# Altium PCB pcb.PcbDoc
Units mil, origin at the board's own origin, x right, y up, seen from the top; angles counter-clockwise.
Board outline 6000 x 4000 mil, 2 copper layers (Top Layer, Bottom Layer); 5 components, 0 nets, 88 pads, 0 vias.
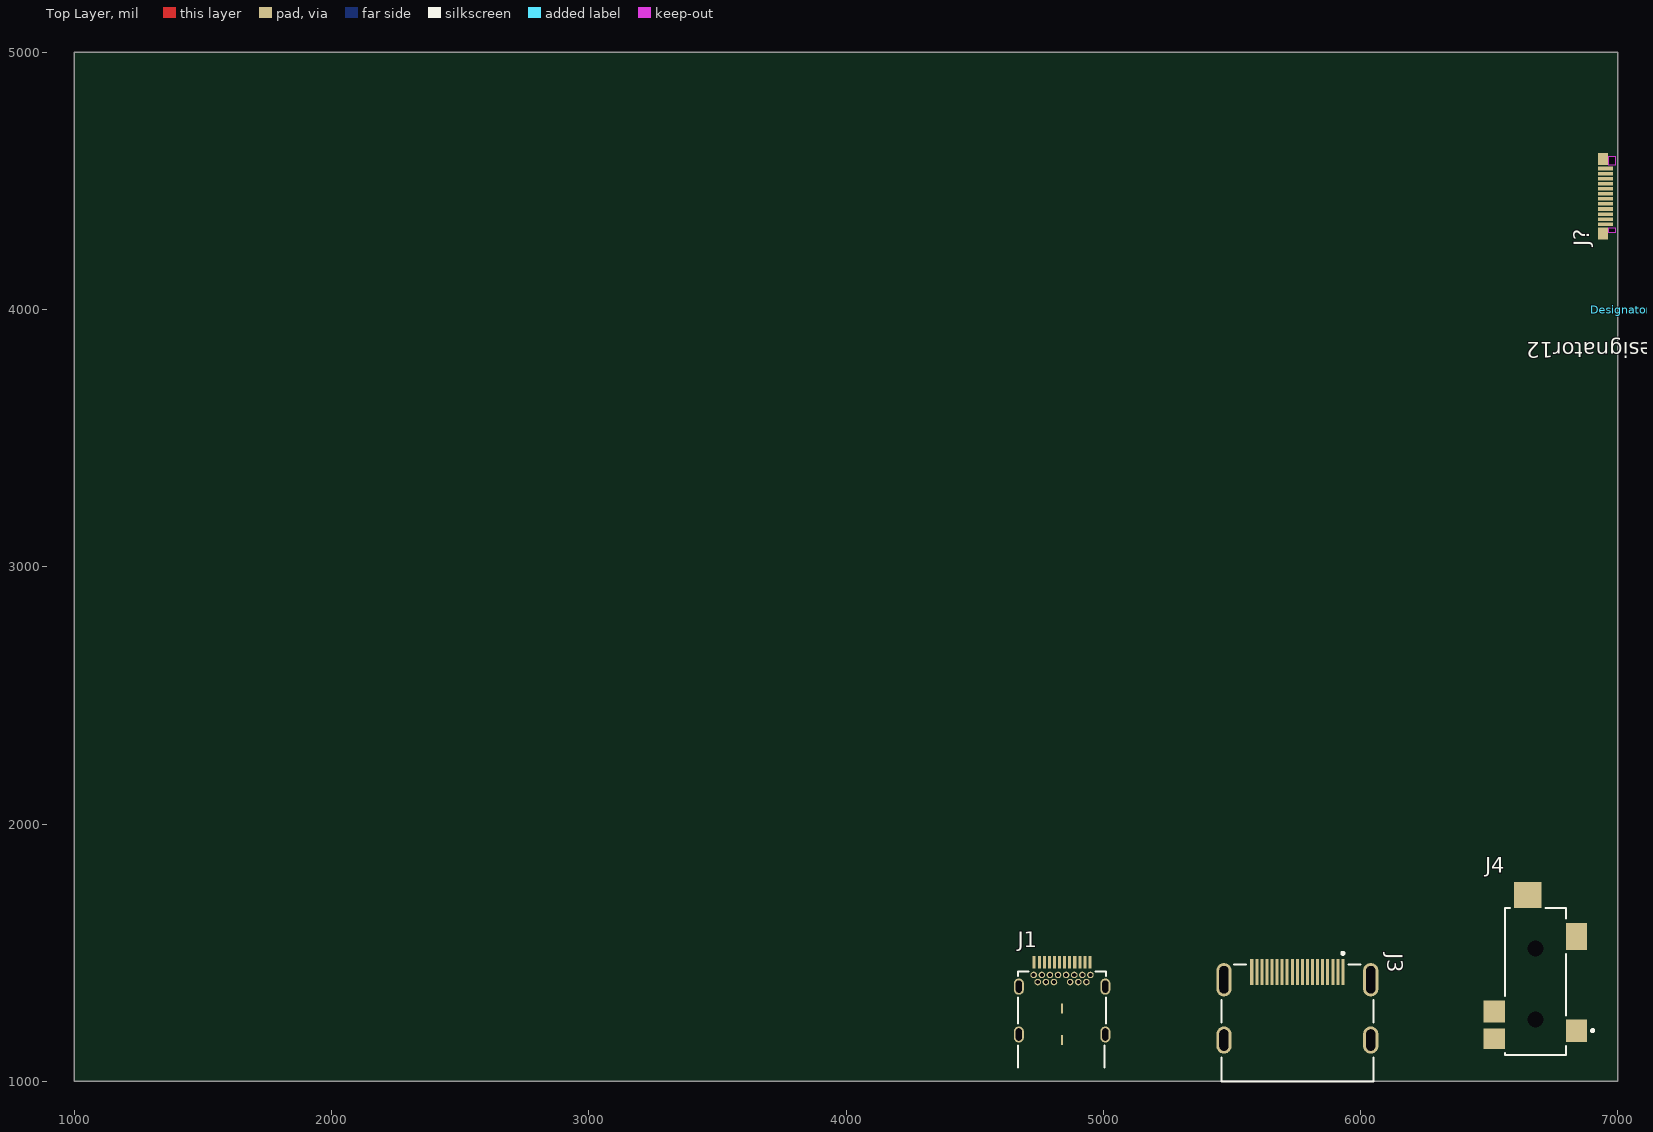
[diagram p0: Top Layer view]
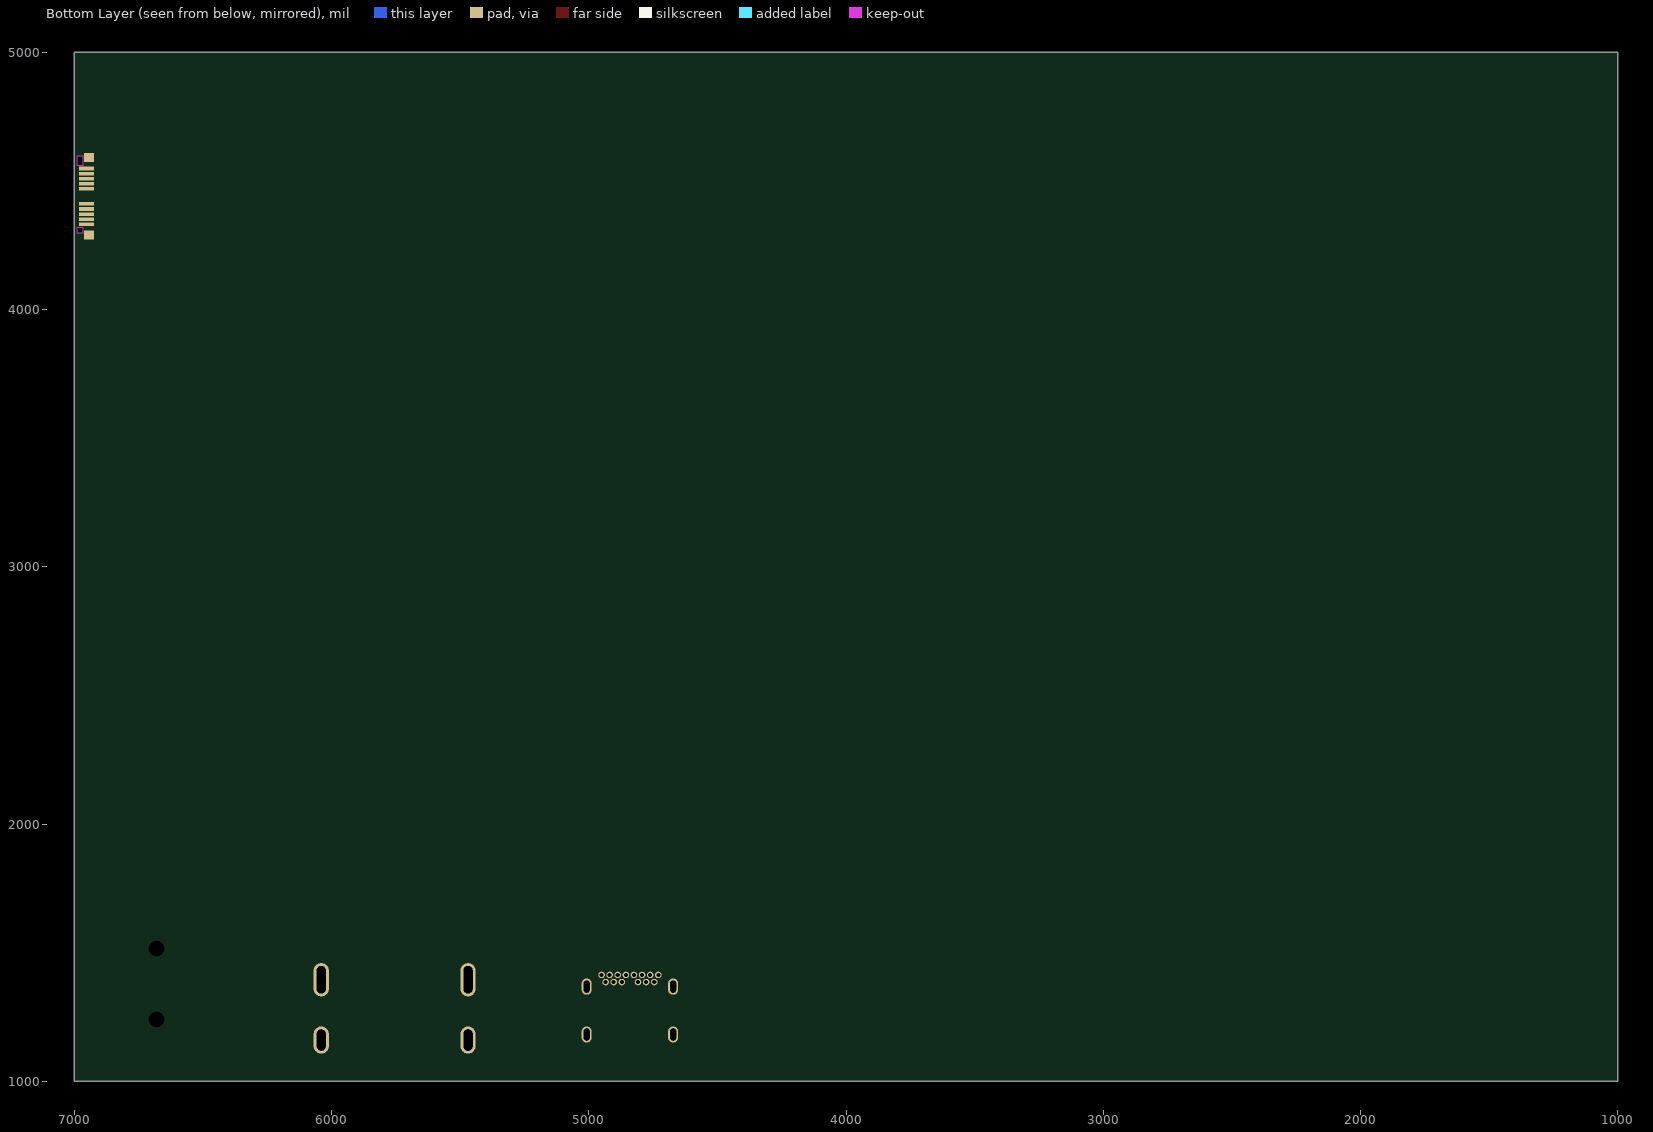
[diagram p1: Bottom Layer view, seen from below]

## Layer stack, top to bottom
Top Solder: solder mask 0.4, Solder Resist, Dk 3.5
Top Layer: signal copper 1.4
Dielectric 1: dielectric 12.6, FR-4, Dk 4.8
Bottom Layer: signal copper 1.4
Bottom Solder: solder mask 0.4, Solder Resist, Dk 3.5

## Board outline
1000,1000 7000,1000 7000,5000 1000,5000

## Design rules (kind name [scope] priority, off if disabled: settings)
Clearance [All] p1: gap=10 ignorepadtopadclearanceinfootprint=FALSE except(0: Arc-Hole Track-Hole SMDPad-Hole THPad-Hole Via-Hole Fill-Hole Poly-Hole Region-Hole Text-Hole)
PolygonConnect [All] p1: connectstyle=Relief reliefconductorwidth=10 reliefentries=4 polygonreliefangle="90 Angle" airgapwidth=10
RoutingVias [All] p1: holewidth=28 width=50 viastyle="Through Hole" minholewidth=28 minwidth=50 maxholewidth=28 maxwidth=50
SolderMaskExpansion [All] p1: expansion=4 istentingtop=FALSE
Width [All] p1: maxlimit=10 minlimit=10 preferedwidth=10
30 further rules are at their usual default settings.

## Classes and differential pairs
component class schematic: J1 J3 J4 J?

## Components (designator, comment, footprint, x,y, rotation, side; value= is the part's Value field where it differs from the comment)
Designator12 "Comment" HDMI_MICRO_MALE 7040,4000 r180 top
J1 "632723300011" USB_C_FEMALE 4840,1228.9 r0 top
J3 "1747981-1" HDMI_FULL_FEMALE 5754.57,1292.28 r0 top
J4 "35RASMT4BHNTRX" AUDIO_FEMALE 6680,1444.72 r90 top
J? "632712000011" USB_C_MALE 7220,4440 r90 top

## Footprints (in the part's own frame and the unit in brackets; to place one, negate y for a bottom-side part, rotate by r counter-clockwise, add the part's x,y. Pads: shape width x height; smd on the part's side, far side on the other; paste and mask are expansions set on the pad)
AUDIO_FEMALE [mm]
  rect 2.2x2.1 smd: 1(-6.3,-4.05) 2(-4.4,4.05)
  rect 2.7x2.1 smd: 3(3,-4.05)
  rect 2x2.1 smd: 4(-7.1,4.05)
  rect 2.6x2.7 smd: 5(7.1,0.75)
  rect 0x0 hole 1.6 unplated: MH(-5.2,0) MH(1.8,0)
  silkscreen extent -8.7,-5.78 5.8,3, body extent -11.2,-3 5.8,3, height 5
HDMI_FULL_FEMALE [mm]
  rect 0.3x2.6 smd: 1(4.5,3.36) 2(4,3.36) 3(3.5,3.36) 4(3,3.36) 5(2.5,3.36) 6(2,3.36) 7(1.5,3.36) 8(1,3.36) 9(0.5,3.36) 10(0,3.36) 11(-0.5,3.36) 12(-1,3.36) 13(-1.5,3.36) 14(-2,3.36) 15(-2.5,3.36) 16(-3,3.36) 17(-3.5,3.36) 18(-4,3.36) 19(-4.5,3.36)
  oval 1.5x3.3 hole 0.9 slot 2.7 at 90 deg: 20(7.25,2.6) 21(-7.25,2.6)
  oval 1.5x2.7 hole 0.9 slot 2.1 at 90 deg: 22(7.25,-3.36) 23(-7.25,-3.36)
  silkscreen extent -7.5,-7.45 7.5,5.33, body extent -7.5,-7.45 7.5,4.55, height 6.18
HDMI_MICRO_MALE [mil]
  body extent -433,-169 83,169, height 75
USB_C_FEMALE [mm]
  rect 0.3x1.2 smd: A1(-2.75,5.93) A2(-2.25,5.93) A3(-1.75,5.93) A4(-1.25,5.93) A5(-0.75,5.93) A6(-0.25,5.93) A7(0.25,5.93) A8(0.75,5.93) A9(1.25,5.93) A10(1.75,5.93) A11(2.25,5.93) A12(2.75,5.93)
  round 0.65 hole 0.4: B1(2.8,4.68) B2(2.4,3.98) B3(1.6,3.98) B4(1.2,4.68) B5(0.8,3.98) B6(0.4,4.68) B7(-0.4,4.68) B8(-0.8,3.98) B9(-1.2,4.68) B10(-1.6,3.98) B11(-2.4,3.98) B12(-2.8,4.68) G1(2,4.68) G2(-2,4.68)
  oval 1x1.6 hole 0.6 slot 1.2 at 90 deg: Shell(-4.27,-1.2) Shell(-4.27,3.53) Shell(4.27,-1.2) Shell(4.27,3.53)
  rect 0.2x1 smd: Shell(0,-1.75) Shell(0,1.35)
  silkscreen extent -4.37,-4.45 4.34,5, body extent -4.37,-5.6 4.37,6.19, height 3.05
USB_C_MALE [mm] "USB 3.1 Type C Plug Horizontal SMT"
  rect 0.35x1.5 smd: A1(2.75,6.8) A2(2.25,6.8) A3(1.75,6.8) A4(1.25,6.8) A5(0.75,6.8) A6(0.25,6.8) A7(-0.25,6.8) A8(-0.75,6.8) A9(-1.25,6.8) A10(-1.75,6.8) A11(-2.25,6.8) A12(-2.75,6.8)
  rect 0.35x1.5 smd far side: B1(-2.75,6.8) B2(-2.25,6.8) B3(-1.75,6.8) B4(-1.25,6.8) B5(-0.75,6.8) B8(0.75,6.8) B9(1.25,6.8) B10(1.75,6.8) B11(2.25,6.8) B12(2.75,6.8)
  rect 0.9x1 smd far side: Shell(-3.825,7.05) Shell(3.825,7.05)
  rect 1.18x1 smd: Shell(-3.69,7.05) Shell(3.69,7.05)
  Keep-Out Layer board cut-out: 3.075,5.85 3.075,6.45 3.945,6.45 3.945,5.85
  Keep-Out Layer board cut-out: -3.58,5.85 -3.58,6.45 -3.08,6.45 -3.08,5.85
  body extent -5.13,-5.92 5.12,7.48, height 1.74

## Part data
J1: library part USB_C_FEMALE, "USB 3.1 Type C Receptacle WR-COM, Horizontal, SMT / THT", Contact Resistance=30mOhm, Manufacturer="Wurth Elektronik", Operating Temperature=-40to105degC, Rated Current=5A, Working Voltage=20VDC, Connector Type=USB3.1TypeC, Datasheet URL=https://katalog.we-online.de/em/datasheet/632723x00011%282%29.pdf, Gender=Receptacle, Manufacturer URL=http://www.we-online.de, Mounting Technology=SMT/THT, Orientation=Horizontal, Package Reference=632723300011, Packaging=TapeandReel, Part Number=632723300011, Publisher=WurthElektronik
J3: library part HDMI_FULL_FEMALE, "HDMI Receptacle, Pitch 0.5 mm, 19 Position, Height 6.38 mm, RoHS, Tape and Reel", Case Code (Imperial)=0603, Case Code (Metric)=1608, Max Operating Temperature=155degC, Min Operating Temperature=-55degC, Package Quantity=5000, Power Rating="100 mW", Resistance="3.6 kohm", Tolerance=1%, Voltage Rating="50 V", Case/Package=0603, ComponentLink1Description="Manufacturer URL", ComponentLink1URL=http://www.te.com/, ComponentLink2Description=Datasheet, ComponentLink2URL=http://www.te.com/commerce/DocumentDelivery/DDEController?Action=showdoc&DocId=Customer+Drawing%7F1747981%7FF5%7Fpdf%7FEnglish%7FENG_CD_1747981_F5.pdf%7F1747981-1, DatasheetVersion="Rev. F5, 12/2015", Height="0.45 mm", Length="1.6 mm", Mount="Surface Mount", PackageDescription="HDMI Receptacle, Pitch 0.5 mm, 19 Position, Height 6.38 mm", PackageReference=1747981-1, Packaging="Tape and Reel", REACH SVHC=Unknown, RoHSCompliant=True, Width="0.8 mm"
J4: library part AUDIO_FEMALE, "Female 3.5 mm Phone Jack, 5 Position, Height 5 mm, RoHS, Tape and Reel", Current Rating="50 mA", Package Quantity=3000, Voltage Rating (DC)="12 V", ComponentLink1Description="Manufacturer URL", ComponentLink1URL=http://www.switchcraft.com/, ComponentLink2Description=Datasheet, ComponentLink2URL=http://www.switchcraft.com/Drawings/35rasmt4bhntrx_cd.pdf, Contact Material=Silver, Contact Plating=Silver, DatasheetVersion="Rev. C, 07/2014", Mount="Through Hole", PackageDescription="Female 3.5 mm Phone Jack, 5 Position, Height 5 mm", PackageReference=35RASMT4BHNTRX, Packaging="Tape and Reel", RoHSCompliant=true
J?: library part USB_C_MALE, "USB 3.1 Type C Plug WR-COM, Horizontal, SMT", Contact Resistance=30mOhm, Manufacturer="Wurth Elektronik", Operating Temperature=-25to105degC, Rated Current=5A, Working Voltage=20VDC, Connector Type=USB3.1TypeC, Datasheet URL=https://katalog.we-online.de/em/datasheet/632712000011.pdf, Gender=Plug, Manufacturer URL=http://www.we-online.de, Mounting Technology=SMT, Orientation=Horizontal, Package Reference=632712000011, Packaging=TapeandReel, Part Number=632712000011, Publisher=WurthElektronik

## Nets (pads, with @x,y where several pads share a name; then routed paths per layer and width w, separated by ;. In a path a pad name is that pad's centre, name@x,y a point inside that pad or via, vN(x,y) a via of type N, cw(c..) or ccw(c..) an arc to the next point about the centre after c; other vN are vias at no path point)
pads on no net: J1.A1 J1.A2 J1.A3 J1.A4 J1.A5 J1.A6 J1.A7 J1.A8 J1.A9 J1.A10 J1.A11 J1.A12 J1.B1 J1.B2 J1.B3 J1.B4 J1.B5 J1.B6 J1.B7 J1.B8 J1.B9 J1.B10 J1.B11 J1.B12 J1.G1 J1.G2 J1.Shell J3.1 J3.2 J3.3 J3.4 J3.5 J3.6 J3.7 J3.8 J3.9 J3.10 J3.11 J3.12 J3.13 J3.14 J3.15 J3.16 J3.17 J3.18 J3.19 J3.20 J3.21 J3.22 J3.23 J4.1 J4.2 J4.3 J4.4 J4.5 J4.MH J?.A1 J?.A2 J?.A3 J?.A4 J?.A5 J?.A6 J?.A7 J?.A8 J?.A9 J?.A10 J?.A11 J?.A12 J?.B1 J?.B2 J?.B3 J?.B4 J?.B5 J?.B8 J?.B9 J?.B10 J?.B11 J?.B12 J?.Shell

## Text inside footprints (layer, text, board x,y; h text height)
J1: Mechanical 2 "PCB Edge" at 4773.07,1008.43 h24